# Altium PCB 00Key.PcbDoc (part 2 of 4)
Units mm, origin at the board's own origin, x right, y up, seen from the top; angles counter-clockwise.
Board outline 304.8 x 170.81 mm, 2 copper layers (F.Cu, B.Cu); 268 components, 236 nets, 1532 pads, 61 vias.
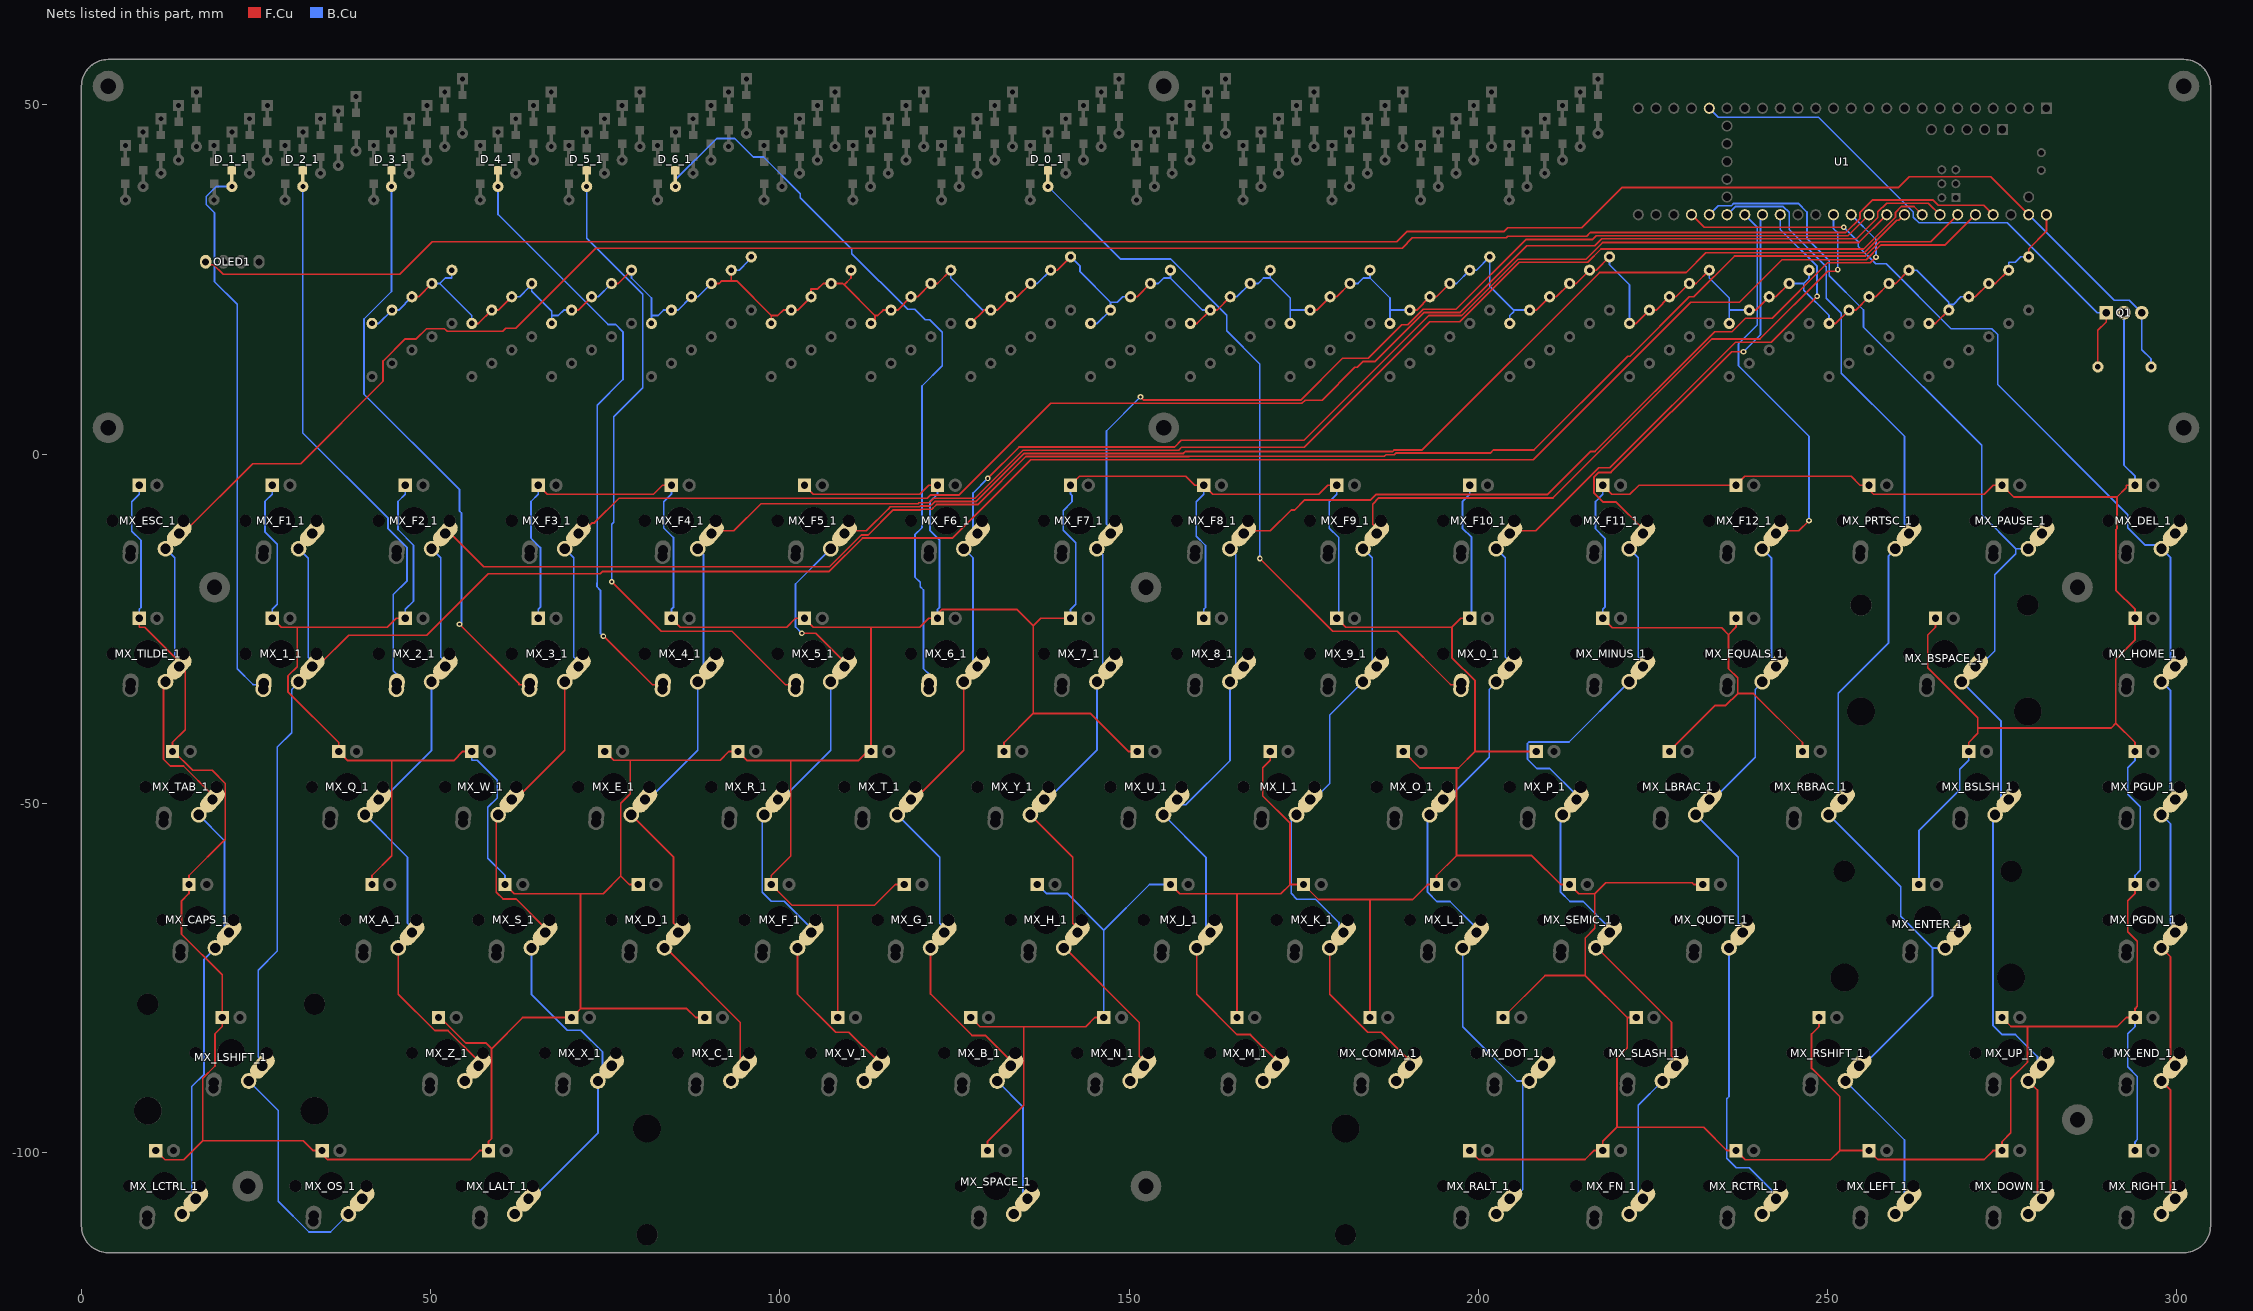
[diagram p2: the nets of this part, all layers, seen from the top]

## Via types
v1: diameter 0.8, hole 0.4, F.Cu to B.Cu, tented both sides, 61 vias

## Nets (pads, with @x,y where several pads share a name; then routed paths per layer and width w, separated by ;. In a path a pad name is that pad's centre, name@x,y a point inside that pad or via, vN(x,y) a via of type N, cw(c..) or ccw(c..) an arc to the next point about the centre after c; other vN are vias at no path point) (continued)
5V: R_0_1.2 R_1_1.2 R_2_1.2 R_3_1.2 R_4_1.2 R_5_1.2 R_6_1.2 R_7_1.2 R_8_1.2 R_9_1.2 R_A_1.2 R_B_1.2 R_BSLSH_1.2 R_BSPACE_1.2 R_C_1.2 R_CAPS_1.2 R_COMMA_1.2 R_D_1.2 R_DEL_1.2 R_DOT_1.2 R_DOWN_1.2 R_E_1.2 R_END_1.2 R_ENTER_1.2 R_EQUALS_1.2 R_ESC_1.2 R_F1_1.2 R_F2_1.2 R_F3_1.2 R_F4_1.2 R_F5_1.2 R_F6_1.2 R_F7_1.2 R_F8_1.2 R_F9_1.2 R_F10_1.2 R_F11_1.2 R_F12_1.2 R_F_1.2 R_FN_1.2 R_G_1.2 R_H_1.2 R_HOME_1.2 R_I_1.2 R_J_1.2 R_K_1.2 R_L_1.2 R_LALT_1.2 R_LBRAC_1.2 R_LCTRL_1.2 R_LEFT_1.2 R_LSHIFT_1.2 R_M_1.2 R_MINUS_1.2 R_N_1.2 R_O_1.2 R_OS_1.2 R_P_1.2 R_PAUSE_1.2 R_PGDN_1.2 R_PGUP_1.2 R_PRTSC_1.2 R_Q_1.2 R_QUOTE_1.2 R_R_1.2 R_RALT_1.2 R_RBRAC_1.2 R_RCTRL_1.2 R_RIGHT_1.2 R_RSHIFT_1.2 R_S_1.2 R_SEMIC_1.2 R_SLASH_1.2 R_SPACE_1.2 R_T_1.2 R_TAB_1.2 R_TILDE_1.2 R_U_1.2 R_UP_1.2 R_V_1.2 R_W_1.2 R_X_1.2 R_Y_1.2 R_Z_1.2 U1.48 | length 384
  F.Cu w0.25: R_TAB_1.2@47.307,22.543 48.26,22.543 R_CAPS_1.2@50.165,24.447 ; R_F1_1.2@55.88,18.732 56.832,18.732 R_1_1.2@58.737,20.637 59.689,20.637 R_LSHIFT_1.2@61.594,22.543 ; R_2_1.2@70.168,20.637 71.119,20.637 R_Q_1.2@73.024,22.543 ; R_A_1.2@75.882,24.447 76.836,24.447 R_Z_1.2@78.741,26.352 ; R_S_1.2@90.171,24.447 91.296,24.447 91.66,24.811 93.027,24.811 ; R_X_1.2@93.027,26.352 93.027,25.79 93.027,24.811 ; R_F4_1.2@98.742,18.732 98.742,19.858 ; R_C_1.2@110.172,26.352 110.172,25.227 109.198,24.253 ; R_F5_1.2@113.031,18.732 113.593,18.732 113.593,19.858 ; R_V_1.2@124.461,26.352 122.556,24.447 R_F_1.2@121.602,24.447 119.697,22.543 R_R_1.2@118.744,22.543 116.839,20.637 R_5_1.2@115.887,20.637 114.762,20.637 113.983,19.858 113.593,19.858 ; R_F6_1.2@127.317,18.732 129.222,20.637 R_6_1.2@130.174,20.637 ; R_6_1.2@130.174,20.075 R_6_1.2@130.174,20.637 ; R_T_1.2@132.642,22.543 R_T_1.2@133.032,22.543 ; R_G_1.2@135.891,24.447 133.986,22.543 R_T_1.2@133.032,22.543 ; R_B_1.2@138.748,26.352 139.699,26.352 R_SPACE_1.2@141.604,28.258 ; R_Y_1.2@150.177,22.543 151.129,22.543 R_H_1.2@153.034,24.447 ; R_F8_1.2@158.751,18.732 159.702,18.732 R_8_1.2@161.607,20.637 162.559,20.637 R_U_1.2@164.464,22.543 ; R_9_1.2@175.894,20.637 176.847,20.637 R_I_1.2@178.752,22.543 179.706,22.543 R_K_1.2@181.611,24.447 ; R_0_1.2@190.183,20.637 191.136,20.637 R_O_1.2@193.041,22.543 193.992,22.543 R_L_1.2@195.897,24.447 ; R_MINUS_1.2@207.327,20.637 208.279,20.637 R_P_1.2@210.184,22.543 211.137,22.543 R_SEMIC_1.2@213.042,24.447 213.996,24.447 R_SLASH_1.2@215.901,26.352 216.852,26.352 R_FN_1.2@218.757,28.258 ; R_F12_1.2@221.614,18.732 222.567,18.732 R_EQUALS_1.2@224.472,20.637 225.426,20.637 R_LBRAC_1.2@227.331,22.543 228.282,22.543 R_QUOTE_1.2@230.188,24.447 231.139,24.447 R_RCTRL_1.2@233.044,26.352 ; R_RBRAC_1.2@238.761,20.637 239.712,20.637 R_ENTER_1.2@241.617,22.543 242.569,22.543 R_RSHIFT_1.2@244.474,24.447 ; R_PAUSE_1.2@250.191,18.732 251.142,18.732 R_BSPACE_1.2@253.047,20.637 253.999,20.637 R_BSLSH_1.2@255.904,22.543 256.858,22.543 R_UP_1.2@258.762,24.447 259.716,24.447 R_DOWN_1.2@261.621,26.352 ; R_DEL_1.2@264.477,18.732 265.429,18.732 R_HOME_1.2@267.334,20.637 ; R_PGUP_1.2@270.192,22.543 271.146,22.543 R_PGDN_1.2@273.051,24.447 274.002,24.447 R_END_1.2@275.907,26.352 ; R_RIGHT_1.2@278.764,28.258 278.764,29.383 281.304,31.923 U1.48@281.304,34.29 ; 93.027,24.811 93.789,24.811 98.742,19.858 ; 98.742,19.858 99.696,19.858 100.475,20.637 R_4_1.2@101.601,20.637 102.552,20.637 R_E_1.2@104.457,22.543 104.457,23.668 105.409,23.668 106.189,24.447 106.752,24.447 R_D_1.2@107.314,24.447 108.44,24.447 109.004,24.447 109.198,24.253 ; 109.198,24.253 113.593,19.858 ; R_6_1.2@130.174,20.637 131.127,20.637 R_T_1.2@133.032,22.543
  B.Cu w0.25: R_ESC_1.2@41.593,18.732 42.545,18.732 R_TILDE_1.2@44.45,20.637 45.402,20.637 R_TAB_1.2@47.307,22.543 ; R_CAPS_1.2@50.165,24.447 51.29,24.447 ; R_LCTRL_1.2@53.023,26.352 53.023,25.227 52.07,25.227 51.29,24.447 ; R_F1_1.2@55.88,18.732 55.88,19.858 51.29,24.447 ; R_LSHIFT_1.2@61.594,22.543 62.72,22.543 64.062,23.885 R_OS_1.2@64.453,23.885 ; R_OS_1.2@64.453,24.447 R_OS_1.2@64.453,23.885 ; R_F2_1.2@67.311,18.732 67.311,19.858 ; R_2_1.2@70.168,20.637 69.042,20.637 68.263,19.858 67.311,19.858 ; R_Q_1.2@73.024,22.543 73.977,22.543 R_A_1.2@75.882,24.447 ; R_Z_1.2@78.741,26.352 78.741,25.227 81.597,22.37 81.597,19.858 ; R_F3_1.2@81.597,18.732 81.597,19.858 ; R_S_1.2@90.171,24.447 88.266,22.543 R_W_1.2@87.312,22.543 85.407,20.637 R_3_1.2@84.454,20.637 83.892,20.637 83.329,20.637 82.549,19.858 81.597,19.858 ; R_X_1.2@93.027,26.352 94.153,26.352 95.495,27.695 95.884,27.695 R_LALT_1.2@95.884,28.258 ; R_V_1.2@124.461,26.352 124.461,25.227 129.049,20.639 ; 129.049,20.637 R_6_1.2@130.174,20.637 ; R_G_1.2@135.891,24.447 136.843,24.447 R_B_1.2@138.748,26.352 ; R_SPACE_1.2@141.604,28.258 142.962,26.9 142.962,26.122 147.321,21.763 ; R_F7_1.2@144.463,18.732 145.416,18.732 R_7_1.2@147.321,20.637 147.321,21.763 ; R_Y_1.2@150.177,22.543 149.052,22.543 148.273,21.763 147.321,21.763 ; R_H_1.2@153.034,24.447 154.16,24.447 154.939,25.227 155.892,25.227 ; R_N_1.2@155.892,26.352 155.892,25.227 ; R_8_1.2@161.607,20.637 160.482,20.637 155.892,25.227 ; R_U_1.2@164.464,22.543 165.417,22.543 R_J_1.2@167.322,24.447 168.448,24.447 169.227,25.227 170.181,25.227 ; R_M_1.2@170.181,26.352 170.181,25.227 ; R_F9_1.2@173.037,18.732 173.037,19.745 173.037,20.637 ; R_9_1.2@175.894,20.637 174.769,20.637 173.037,20.637 ; R_K_1.2@181.611,24.447 182.736,24.447 183.516,25.227 184.468,25.227 ; R_COMMA_1.2@184.468,26.352 184.468,25.227 ; R_F10_1.2@187.324,18.732 187.324,19.745 187.324,20.637 ; R_0_1.2@190.183,20.637 189.057,20.637 187.324,20.637 ; R_L_1.2@195.897,24.447 196.849,24.447 R_DOT_1.2@198.754,26.352 199.707,26.352 R_RALT_1.2@201.612,28.258 201.612,27.132 201.612,24.058 205.033,20.637 ; R_F11_1.2@204.471,18.732 204.471,19.858 205.033,20.421 205.033,20.637 ; R_MINUS_1.2@207.327,20.637 206.202,20.637 205.033,20.637 ; R_FN_1.2@218.757,28.258 218.757,27.132 221.614,24.275 R_F12_1.2@221.614,18.732 ; R_RCTRL_1.2@233.044,26.352 233.044,25.227 235.903,22.369 235.903,20.637 ; R_PRTSC_1.2@235.903,18.732 235.903,19.858 235.903,20.637 ; R_RBRAC_1.2@238.761,20.637 237.635,20.637 235.903,20.637 ; R_RSHIFT_1.2@244.474,24.447 245.6,24.447 246.553,24.447 ; R_LEFT_1.2@247.332,26.352 247.332,25.227 246.553,24.447 ; R_PAUSE_1.2@250.191,18.732 250.191,19.858 246.553,23.496 246.553,24.447 ; R_DOWN_1.2@261.621,26.352 262.746,26.352 ; 262.746,26.351 267.334,21.763 R_HOME_1.2@267.334,21.423 ; R_HOME_1.2@267.334,20.637 R_HOME_1.2@267.334,21.423 ; R_PGUP_1.2@270.192,22.543 269.067,22.543 267.948,21.423 R_HOME_1.2@267.334,21.423 ; R_END_1.2@275.907,26.352 275.907,27.478 276.859,27.478 277.639,28.258 R_RIGHT_1.2@278.764,28.258 ; R_OS_1.2@64.453,23.885 64.453,23.322 67.311,20.464 67.311,19.858 ; 170.181,25.227 173.037,22.37 173.037,20.637 ; 184.468,25.227 187.324,22.37 187.324,20.637
col0: MX_CAPS_1.1 MX_ESC_1.1 MX_LCTRL_1.1 MX_TAB_1.1 MX_TILDE_1.1 U1.45 | length 392.2
  F.Cu w0.25: MX_TILDE_1.1@12.025,-32.574 11.74,-32.86 11.74,-43.658 12.712,-44.63 14.597,-44.63 18.651,-48.684 18.711,-48.684 19.088,-49.061 18.098,-50.164 MX_TAB_1.1@16.788,-51.624 ; MX_ESC_1.1@12.025,-13.524 13.335,-12.214 13.335,-12.064 14.325,-10.961 14.895,-10.961 24.502,-1.354 31.38,-1.354 43.172,10.438 43.172,13.331 46.349,16.508 47.938,16.508 49.397,17.967 51.969,17.967 52.343,17.592 60.296,17.592 60.746,18.043 62.171,18.043 73.632,29.503 189.065,29.503 190.541,30.979 203.983,30.979 204.208,31.204 215.483,31.204 216.021,31.743 252.566,31.743 254.634,33.812 254.634,34.639 256.384,36.388 265.111,36.388 265.841,35.658 272.316,35.658 U1.45@273.684,34.29 ; MX_LCTRL_1.1@14.406,-108.774 14.406,-108.624 MX_LCTRL_1.1@15.716,-107.314
  B.Cu w0.25: MX_TILDE_1.1@12.025,-32.574 13.335,-31.264 13.335,-31.114 14.325,-30.011 13.335,-29.021 13.335,-14.834 MX_ESC_1.1@12.025,-13.524 ; MX_LCTRL_1.1@15.716,-107.314 15.778,-107.253 15.778,-90.518 17.552,-88.745 17.552,-72.292 MX_CAPS_1.1@19.169,-70.674 20.479,-69.364 20.479,-69.214 20.479,-67.121 20.479,-55.316 MX_TAB_1.1@16.788,-51.624
col1: MX_1_1.1 MX_F1_1.1 MX_LSHIFT_1.1 MX_OS_1.1 U1.44 | length 383.8
  F.Cu w0.25: MX_1_1.1@32.385,-31.114 33.375,-30.011 34.144,-30.011 38.237,-25.918 49.421,-25.918 58.227,-17.112 74.291,-17.112 74.626,-16.777 107.048,-16.777 111.817,-12.007 124.687,-12.007 135.916,-0.778 207.824,-0.778 230.365,21.763 237.364,21.763 243.449,27.848 255.503,27.848 257.627,29.971 266.826,29.971 U1.44@271.144,34.29 ; MX_OS_1.1@38.219,-108.774 38.219,-108.624 MX_OS_1.1@39.529,-107.314
  B.Cu w0.25: MX_1_1.1@31.075,-32.574 31.235,-32.415 MX_1_1.1@31.235,-32.396 ; MX_F1_1.1@32.385,-12.064 31.075,-13.374 MX_F1_1.1@31.075,-13.524 32.447,-14.896 32.447,-29.082 33.375,-30.011 32.385,-31.114 MX_1_1.1@31.235,-32.396 ; MX_OS_1.1@38.219,-108.774 35.642,-111.351 32.573,-111.351 28.163,-106.941 28.163,-93.956 MX_LSHIFT_1.1@23.931,-89.724 25.241,-88.414 25.241,-88.264 26.232,-87.161 25.303,-86.232 25.303,-73.86 28.04,-71.123 28.04,-41.911 30.085,-39.866 30.085,-33.678 MX_1_1.1@31.235,-32.396
col2: MX_2_1.1 MX_A_1.1 MX_F2_1.1 MX_Q_1.1 MX_Z_1.1 U1.43 | length 335.8
  F.Cu w0.25: MX_A_1.1@46.672,-69.214 45.363,-70.524 MX_A_1.1@45.363,-70.674 45.363,-77.288 50.58,-82.505 52.456,-82.505 56.735,-86.784 56.811,-86.784 57.188,-87.161 MX_Z_1.1@56.197,-88.264 ; MX_2_1.1@50.125,-32.574 50.125,-32.424 MX_2_1.1@51.435,-31.114 ; MX_F2_1.1@51.435,-12.064 52.425,-10.961 57.569,-16.105 107.083,-16.105 111.631,-11.557 112.619,-11.557 116.202,-7.974 120.15,-7.974 120.251,-7.874 121.723,-7.874 121.898,-7.698 121.906,-7.698 122.399,-7.205 128.294,-7.205 135.171,-0.328 158.565,-0.328 158.61,-0.283 186.532,-0.283 186.758,-0.056 187.919,-0.056 188.143,0.168 201.7,0.168 202.15,0.618 207.946,0.618 221.373,14.045 221.692,14.045 230.19,22.544 230.827,22.544 236.662,28.378 255.397,28.378 257.44,30.422 264.736,30.422 U1.43@268.604,34.29
  B.Cu w0.25: MX_A_1.1@46.672,-69.214 47.663,-68.111 46.672,-67.121 46.672,-57.697 MX_Q_1.1@40.6,-51.624 41.91,-50.314 41.91,-50.164 42.364,-50.164 50.125,-42.403 MX_2_1.1@50.125,-32.574 ; MX_2_1.1@51.435,-31.114 52.425,-30.011 51.435,-29.021 51.435,-14.834 MX_F2_1.1@50.125,-13.524 51.435,-12.214 MX_F2_1.1@51.435,-12.064 ; MX_Z_1.1@54.888,-89.724 56.197,-88.414 MX_Z_1.1@56.197,-88.264
col3: MX_3_1.1 MX_F3_1.1 MX_LALT_1.1 MX_S_1.1 MX_W_1.1 MX_X_1.1 U1.42 | length 336.7
  F.Cu w0.25: MX_S_1.1@64.413,-70.674 65.722,-69.364 65.722,-69.214 66.713,-68.111 66.336,-67.734 66.276,-67.734 62.222,-63.68 60.362,-63.68 59.365,-62.682 59.365,-51.91 MX_W_1.1@59.65,-51.624 60.96,-50.314 60.96,-50.164 61.95,-49.061 62.504,-49.061 69.174,-42.39 MX_3_1.1@69.174,-32.574 ; MX_F3_1.1@70.484,-12.064 71.475,-10.961 72.018,-10.961 73.15,-9.829 73.429,-9.829 76.955,-6.302 121.073,-6.302 121.523,-5.852 125.609,-5.852 138.757,7.296 174.723,7.296 175.173,7.746 177.611,7.746 182.31,12.444 182.628,12.444 183.477,13.294 185.238,13.294 192.253,20.308 197.393,20.308 206.918,29.833 216.659,29.833 217.668,30.842 254.122,30.842 257.174,33.895 257.174,34.691 258.421,35.938 264.417,35.938 U1.42@266.064,34.29
  B.Cu w0.25: MX_LALT_1.1@62.031,-108.774 63.341,-107.464 63.341,-107.314 63.841,-107.314 73.938,-97.218 MX_X_1.1@73.938,-89.724 73.938,-88.919 MX_X_1.1@74.593,-88.264 ; MX_S_1.1@64.413,-70.674 64.413,-77.288 69.571,-82.446 71.479,-82.446 74.593,-85.559 MX_X_1.1@74.593,-88.264 ; MX_3_1.1@69.174,-32.574 70.484,-31.264 70.484,-31.114 71.475,-30.011 70.484,-29.021 70.484,-14.834 MX_F3_1.1@69.174,-13.524 70.484,-12.214 MX_F3_1.1@70.484,-12.064 ; MX_X_1.1@75.248,-88.264 MX_X_1.1@74.593,-88.264
col4: MX_4_1.1 MX_C_1.1 MX_D_1.1 MX_E_1.1 MX_F4_1.1 U1.41 | length 287.1
  F.Cu w0.25: MX_E_1.1@78.701,-51.624 84.772,-57.696 84.772,-67.121 85.763,-68.111 84.772,-69.214 83.623,-70.364 MX_D_1.1@83.623,-70.674 ; MX_D_1.1@83.463,-70.674 MX_D_1.1@83.623,-70.674 ; MX_F4_1.1@89.534,-12.064 90.525,-10.961 93.402,-10.961 97.289,-7.073 119.777,-7.073 119.89,-6.96 121.34,-6.96 121.503,-6.797 121.533,-6.797 122.028,-6.302 127.923,-6.302 134.798,0.573 157.072,0.573 157.483,0.984 175.065,0.984 193.039,18.957 197.314,18.957 205.835,27.478 215.63,27.478 217.535,29.383 255.129,29.383 259.714,33.968 259.714,34.646 260.533,35.465 262.35,35.465 U1.41@263.524,34.29 ; MX_C_1.1@92.988,-89.724 94.297,-88.414 94.297,-88.264 94.297,-86.171 94.297,-81.349 MX_D_1.1@83.623,-70.674
  B.Cu w0.25: MX_E_1.1@78.701,-51.624 80.011,-50.314 80.011,-50.164 80.442,-50.164 88.224,-42.382 MX_4_1.1@88.224,-32.574 88.224,-31.946 MX_4_1.1@89.056,-31.114 ; MX_4_1.1@89.534,-31.114 MX_4_1.1@89.056,-31.114 ; MX_F4_1.1@89.534,-12.064 89.534,-12.214 MX_F4_1.1@88.224,-13.524 89.056,-14.356 MX_4_1.1@89.056,-31.114
col5: MX_5_1.1 MX_F5_1.1 MX_F_1.1 MX_R_1.1 MX_V_1.1 U1.40 | length 273.5
  F.Cu w0.25: v1(103.134,-25.629) 105.134,-25.629 109.138,-29.634 109.198,-29.634 109.575,-30.011 MX_5_1.1@108.584,-31.114 ; MX_F_1.1@103.822,-69.214 102.513,-70.524 MX_F_1.1@102.513,-70.674 102.513,-77.295 107.957,-82.739 109.856,-82.739 113.901,-86.784 113.961,-86.784 114.338,-87.161 113.347,-88.264 113.347,-88.414 MX_V_1.1@112.038,-89.724 ; MX_F5_1.1@108.584,-12.064 109.575,-10.961 112.372,-10.961 115.472,-7.861 115.81,-7.524 119.964,-7.524 120.077,-7.411 121.527,-7.411 121.69,-7.248 121.72,-7.248 122.214,-6.753 128.109,-6.753 134.985,0.123 157.756,0.123 158.027,0.394 187.733,0.394 187.957,0.618 191.928,0.618 217.333,26.023 229.753,26.023 232.558,28.829 255.211,28.829 259.873,33.49 260.185,33.49 U1.40@260.984,34.29
  B.Cu w0.25: v1(103.134,-25.629) 102.227,-24.722 102.227,-18.572 MX_F5_1.1@107.274,-13.524 108.584,-12.214 MX_F5_1.1@108.584,-12.064 ; MX_F_1.1@103.822,-69.214 104.813,-68.111 104.436,-67.734 104.352,-67.734 100.602,-63.983 98.739,-63.983 97.465,-62.709 97.465,-51.91 MX_R_1.1@97.751,-51.624 99.061,-50.314 99.061,-50.164 100.051,-49.061 100.596,-49.061 107.274,-42.383 MX_5_1.1@107.274,-32.574 107.274,-32.424 MX_5_1.1@108.584,-31.114
col6: MX_6_1.1 MX_B_1.1 MX_F6_1.1 MX_G_1.1 MX_SPACE_1.1 MX_T_1.1 U1.39 | length 269.3
  F.Cu w0.25: MX_T_1.1@118.111,-50.164 119.101,-49.061 119.645,-49.061 126.324,-42.382 MX_6_1.1@126.324,-32.574 126.324,-32.424 MX_6_1.1@127.634,-31.114 ; MX_G_1.1@122.872,-69.214 121.563,-70.524 MX_G_1.1@121.563,-70.674 121.563,-77.272 127.493,-83.202 129.369,-83.202 132.951,-86.784 133.011,-86.784 133.388,-87.161 MX_B_1.1@132.398,-88.264 ; v1(129.739,-3.46) 134.223,1.023 156.475,1.023 157.466,2.014 175.027,2.014 192.871,19.858 197.579,19.858 205.649,27.928 215.391,27.928 217.768,30.306 254.46,30.306 U1.39@258.444,34.29 ; MX_SPACE_1.1@133.469,-108.774 133.469,-108.624 MX_SPACE_1.1@134.779,-107.314
  B.Cu w0.25: MX_T_1.1@118.111,-50.164 118.111,-50.314 MX_T_1.1@116.801,-51.624 122.872,-57.696 122.872,-67.121 123.863,-68.111 MX_G_1.1@122.872,-69.214 ; MX_6_1.1@127.634,-31.114 127.634,-29.021 127.634,-14.834 MX_F6_1.1@126.324,-13.524 127.634,-12.214 127.634,-12.064 127.644,-12.055 127.644,-5.556 v1(129.739,-3.46) ; MX_B_1.1@132.398,-88.264 131.088,-89.574 MX_B_1.1@131.088,-89.724 134.779,-93.416 134.779,-104.934 MX_SPACE_1.1@134.779,-107.314
col7: MX_7_1.1 MX_F7_1.1 MX_H_1.1 MX_N_1.1 MX_Y_1.1 U1.38 | length 231.8
  F.Cu w0.25: MX_Y_1.1@137.161,-50.164 135.851,-51.474 MX_Y_1.1@135.851,-51.624 141.922,-57.696 141.922,-67.121 142.913,-68.111 141.922,-69.214 140.773,-70.364 MX_H_1.1@140.773,-70.674 ; MX_H_1.1@140.613,-70.674 MX_H_1.1@140.773,-70.674 ; MX_N_1.1@150.138,-89.724 151.447,-88.414 151.447,-88.264 152.438,-87.161 151.447,-86.171 151.447,-81.349 MX_H_1.1@140.773,-70.674 ; v1(151.618,8.204) 152.073,7.75 174.539,7.75 180.534,13.744 184.193,13.744 189.003,18.554 189.861,18.554 192.066,20.759 196.781,20.759 206.756,30.734 216.286,30.734 216.844,31.293 252.907,31.293 U1.38@255.904,34.29
  B.Cu w0.25: MX_Y_1.1@137.161,-50.164 138.151,-49.061 138.694,-49.061 145.374,-42.38 MX_7_1.1@145.374,-32.574 145.374,-31.946 MX_7_1.1@146.206,-31.114 ; MX_7_1.1@146.684,-31.114 MX_7_1.1@146.206,-31.114 ; v1(151.618,8.204) 146.746,3.332 146.746,-10.032 147.675,-10.961 146.684,-12.064 146.684,-12.214 MX_F7_1.1@145.374,-13.524 146.206,-14.356 MX_7_1.1@146.206,-31.114
col8: MX_8_1.1 MX_F8_1.1 MX_J_1.1 MX_M_1.1 MX_U_1.1 U1.37 | length 209.9
  F.Cu w0.25: MX_J_1.1@159.663,-70.674 159.663,-77.31 165.435,-83.083 167.35,-83.083 171.051,-86.784 171.111,-86.784 171.488,-87.161 MX_M_1.1@170.498,-88.264 ; MX_F8_1.1@165.734,-12.064 166.725,-10.961 170.198,-10.961 173.182,-7.977 173.705,-7.977 175.148,-6.533 184.569,-6.533 185.357,-5.746 209.899,-5.746 216.051,0.406 216.688,0.406 233.817,17.536 236.298,17.536 238.23,19.469 242.04,19.469 249.969,27.397 256.078,27.397 v1(256.908,28.227)
  B.Cu w0.25: MX_J_1.1@159.663,-70.674 160.972,-69.364 160.972,-69.214 160.972,-67.121 160.972,-57.696 MX_U_1.1@154.901,-51.624 156.211,-50.314 156.211,-50.164 158.114,-50.164 164.424,-43.854 164.424,-41.869 MX_8_1.1@164.424,-32.574 164.424,-31.946 MX_8_1.1@165.256,-31.114 ; MX_8_1.1@165.734,-31.114 MX_8_1.1@165.256,-31.114 ; MX_F8_1.1@165.734,-12.064 165.734,-12.214 MX_F8_1.1@164.424,-13.524 165.256,-14.356 MX_8_1.1@165.256,-31.114 ; MX_M_1.1@169.188,-89.724 169.188,-89.574 MX_M_1.1@170.498,-88.264 ; U1.37@253.364,34.29 256.908,30.746 v1(256.908,28.227)
col9: MX_9_1.1 MX_COMMA_1.1 MX_F9_1.1 MX_I_1.1 MX_K_1.1 U1.36 | length 190
  F.Cu w0.25: MX_K_1.1@178.713,-70.674 178.713,-77.316 184.146,-82.749 186.066,-82.749 190.101,-86.784 190.161,-86.784 190.538,-87.161 189.547,-88.264 189.547,-88.414 MX_COMMA_1.1@188.238,-89.724 ; MX_F9_1.1@184.784,-12.064 185.775,-10.961 184.845,-10.031 184.845,-7.155 185.747,-6.253 210.665,-6.253 233.416,16.498 240.288,16.498 250.001,26.211 251.215,26.211 v1(251.433,26.43)
  B.Cu w0.25: MX_K_1.1@178.713,-70.674 180.022,-69.364 180.022,-69.214 180.022,-67.053 176.662,-63.692 174.002,-63.692 173.179,-62.869 173.179,-52.396 MX_I_1.1@173.951,-51.624 175.261,-50.314 175.261,-50.164 175.689,-50.164 178.722,-47.132 178.722,-37.327 MX_9_1.1@183.474,-32.574 184.784,-31.264 184.784,-31.114 184.784,-29.021 184.784,-14.834 MX_F9_1.1@183.474,-13.524 184.784,-12.214 MX_F9_1.1@184.784,-12.064 ; U1.36@250.824,34.29 250.824,32.302 251.433,31.693 v1(251.433,26.43)
col10: MX_0_1.1 MX_DOT_1.1 MX_F10_1.1 MX_L_1.1 MX_O_1.1 MX_RALT_1.1 U1.33 | length 191.8
  F.Cu w0.25: MX_F10_1.1@203.834,-12.064 204.825,-10.961 208.171,-10.961 217.206,-1.926 218.815,-1.926 236.788,16.048 241.894,16.048 v1(248.476,22.629) ; MX_DOT_1.1@207.288,-89.724 208.597,-88.414 MX_DOT_1.1@208.597,-88.264
  B.Cu w0.25: MX_RALT_1.1@202.524,-108.774 203.834,-107.464 203.834,-107.314 204.825,-106.211 205.397,-106.211 206.342,-105.266 MX_DOT_1.1@206.342,-89.724 ; MX_0_1.1@202.524,-32.574 202.524,-32.688 201.534,-33.678 ; MX_F10_1.1@203.834,-12.064 202.524,-13.374 MX_F10_1.1@202.524,-13.524 203.834,-14.834 203.834,-29.021 204.825,-30.011 203.834,-31.114 201.534,-33.678 ; MX_DOT_1.1@207.288,-89.724 MX_DOT_1.1@206.342,-89.724 ; U1.33@243.204,34.29 243.204,32.168 248.476,26.897 v1(248.476,22.629) ; 201.534,-33.678 201.534,-43.403 195.877,-49.061 195.301,-49.061 194.311,-50.164 194.311,-50.314 MX_O_1.1@193.001,-51.624 192.715,-51.91 192.715,-62.72 194.027,-64.033 195.925,-64.033 199.626,-67.734 199.686,-67.734 200.063,-68.111 199.072,-69.214 197.763,-70.524 MX_L_1.1@197.763,-70.674 197.763,-81.98 205.508,-89.724 MX_DOT_1.1@206.342,-89.724
col11: MX_F11_1.1 MX_FN_1.1 MX_MINUS_1.1 MX_P_1.1 MX_SEMIC_1.1 MX_SLASH_1.1 U1.32 | length 189.6
  F.Cu w0.25: MX_SEMIC_1.1@216.813,-70.674 MX_SEMIC_1.1@216.973,-70.674 ; MX_SEMIC_1.1@218.123,-69.214 216.973,-70.364 MX_SEMIC_1.1@216.973,-70.674 ; MX_F11_1.1@222.884,-12.064 223.875,-10.961 223.498,-10.584 223.475,-10.584 219.74,-6.848 217.843,-6.848 216.527,-5.532 216.527,-3.315 217.24,-2.601 218.959,-2.601 236.235,14.675 v1(237.946,14.675) ; MX_SLASH_1.1@227.647,-88.264 228.638,-87.161 227.647,-86.171 227.647,-81.349 MX_SEMIC_1.1@216.973,-70.674
  B.Cu w0.25: MX_SEMIC_1.1@218.123,-69.214 219.113,-68.111 218.736,-67.734 218.676,-67.734 214.975,-64.033 213.107,-64.033 211.756,-62.682 211.756,-51.919 MX_P_1.1@212.051,-51.624 213.361,-50.314 213.361,-50.164 214.351,-49.061 213.974,-48.684 213.914,-48.684 210.213,-44.983 208.354,-44.983 207.003,-43.632 207.003,-41.422 207.228,-41.197 212.952,-41.197 MX_MINUS_1.1@221.574,-32.574 222.884,-31.264 222.884,-31.114 223.875,-30.011 222.884,-29.021 222.884,-14.834 MX_F11_1.1@221.574,-13.524 221.574,-13.374 MX_F11_1.1@222.884,-12.064 ; MX_FN_1.1@221.574,-108.774 221.574,-108.624 222.884,-107.314 222.884,-93.177 MX_SLASH_1.1@226.338,-89.724 227.647,-88.414 MX_SLASH_1.1@227.647,-88.264 ; v1(237.946,14.675) 240.366,17.095 240.366,33.992 U1.32@240.664,34.29
col12: MX_EQUALS_1.1 MX_F12_1.1 MX_LBRAC_1.1 MX_QUOTE_1.1 MX_RCTRL_1.1 U1.31 | length 169.5
  F.Cu w0.25: MX_F12_1.1@241.934,-12.064 242.925,-10.961 245.859,-10.961 v1(247.316,-9.504)
  B.Cu w0.25: U1.31@238.124,34.29 239.916,32.498 239.916,18.498 237.221,15.803 237.221,12.689 247.316,2.593 v1(247.316,-9.504) ; MX_RCTRL_1.1@240.624,-108.774 240.624,-108.624 241.934,-107.314 242,-107.249 242,-105.345 238.787,-102.133 236.883,-102.133 235.554,-100.803 235.554,-92.262 235.863,-91.953 MX_QUOTE_1.1@235.863,-70.674 235.863,-70.524 237.172,-69.214 238.163,-68.111 237.172,-67.121 237.172,-57.696 MX_LBRAC_1.1@231.101,-51.624 232.411,-50.314 232.411,-50.164 233.401,-49.061 233.968,-49.061 239.634,-43.394 239.634,-33.678 ; MX_EQUALS_1.1@240.624,-32.574 240.624,-32.688 239.634,-33.678 ; MX_F12_1.1@241.934,-12.064 241.934,-12.214 MX_F12_1.1@240.624,-13.524 241.934,-14.834 241.934,-29.021 242.925,-30.011 241.934,-31.114 239.634,-33.678
col13: MX_ENTER_1.1 MX_LEFT_1.1 MX_PRTSC_1.1 MX_RBRAC_1.1 MX_RSHIFT_1.1 U1.30 | length 186.9
  F.Cu w0.25: MX_ENTER_1.1@266.819,-70.674 268.129,-69.364 MX_ENTER_1.1@268.129,-69.214
  B.Cu w0.25: U1.30@235.584,34.29 236.751,35.457 243.644,35.457 244.474,34.626 244.474,32.169 249.778,26.865 249.778,22.345 251.922,20.202 251.922,11.62 260.984,2.557 260.984,-9.971 261.975,-10.961 260.984,-12.064 258.684,-14.628 ; MX_LEFT_1.1@259.674,-108.774 260.984,-107.464 260.984,-107.314 260.984,-105.221 260.984,-98.177 MX_RSHIFT_1.1@252.531,-89.724 252.531,-89.574 253.841,-88.264 254.832,-87.161 255.392,-87.161 264.983,-77.57 264.983,-70.674 ; MX_PRTSC_1.1@259.674,-13.524 259.674,-13.638 258.684,-14.628 ; MX_ENTER_1.1@266.819,-70.674 264.983,-70.674 ; 258.684,-14.628 258.684,-27.059 251.522,-34.221 251.522,-48.132 252.451,-49.061 251.461,-50.164 250.151,-51.474 MX_RBRAC_1.1@250.151,-51.624 260.439,-61.913 260.439,-66.13 264.983,-70.674
col14: MX_BSLSH_1.1 MX_BSPACE_1.1 MX_DOWN_1.1 MX_PAUSE_1.1 MX_UP_1.1 U1.29 | length 186.9
  F.Cu w0.25: MX_DOWN_1.1@278.724,-108.774 280.034,-107.464 280.034,-107.314 280.034,-105.221 280.034,-91.034 MX_UP_1.1@278.724,-89.724
  B.Cu w0.25: U1.29@233.044,34.29 234.314,35.56 236.218,35.56 236.565,35.907 245.791,35.907 247.014,34.683 247.014,30.903 250.229,27.689 250.229,25.543 255.117,20.654 255.117,18.198 272.036,1.279 272.036,-8.63 276.93,-13.524 ; MX_BSLSH_1.1@275.272,-50.164 MX_BSLSH_1.1@274.794,-50.164 ; MX_UP_1.1@278.724,-89.724 280.034,-88.414 280.034,-88.264 280.034,-86.23 276.887,-83.083 274.964,-83.083 273.677,-81.796 273.677,-51.91 MX_BSLSH_1.1@273.963,-51.624 273.963,-50.996 MX_BSLSH_1.1@274.794,-50.164 ; MX_PAUSE_1.1@280.034,-12.064 278.724,-13.374 MX_PAUSE_1.1@278.724,-13.524 276.93,-13.524 ; MX_BSLSH_1.1@274.794,-50.164 274.794,-38.168 MX_BSPACE_1.1@269.201,-32.574 270.511,-31.264 270.511,-31.114 271.501,-30.011 272.048,-30.011 273.896,-28.163 273.896,-17.26 276.93,-14.226 276.93,-13.524
col15: MX_DEL_1.1 MX_END_1.1 MX_HOME_1.1 MX_PGDN_1.1 MX_PGUP_1.1 MX_RIGHT_1.1 U1.28 | length 197
  F.Cu w0.25: U1.28@230.504,34.29 232.298,32.496 v1(252.293,32.496) ; MX_PGDN_1.1@297.774,-70.674 299.084,-71.984 299.084,-85.726 299.084,-88.264 299.084,-88.414 MX_END_1.1@297.774,-89.724 299.084,-91.034 299.084,-105.221 MX_RIGHT_1.1@299.084,-107.314
  B.Cu w0.25: v1(252.293,32.496) 254.373,30.416 254.373,29.737 256.851,27.259 258.354,27.259 267.642,17.971 273.504,17.971 274.332,17.143 274.332,9.986 292.955,-8.638 292.955,-10.546 295.39,-12.981 MX_DEL_1.1@297.774,-12.981 ; MX_RIGHT_1.1@297.774,-108.774 297.774,-108.624 MX_RIGHT_1.1@299.084,-107.314 ; MX_PGDN_1.1@297.774,-70.674 299.084,-69.364 299.084,-69.214 300.075,-68.111 299.084,-67.121 299.084,-52.934 MX_PGUP_1.1@297.774,-51.624 299.084,-50.314 299.084,-50.164 300.075,-49.061 299.084,-48.071 299.084,-33.884 MX_HOME_1.1@297.774,-32.574 299.084,-31.264 299.084,-31.114 299.084,-29.021 299.084,-14.834 MX_DEL_1.1@297.774,-13.524 MX_DEL_1.1@297.774,-12.981 ; MX_DEL_1.1@299.084,-12.064 298.168,-12.981 MX_DEL_1.1@297.774,-12.981
GND: OLED1.1 Q1.3 R_Q1_GATE_1.2 U1.47 | length 300.1
  F.Cu w0.25: OLED1.1@17.779,27.554 18.202,27.133 18.905,27.133 20.269,25.769 45.549,25.769 50.214,30.434 188.296,30.434 189.742,31.88 203.609,31.88 204.173,32.443 214.81,32.443 220.571,38.204 260.143,38.204 261.668,39.728 273.326,39.728 U1.47@278.764,34.29
  B.Cu w0.25: U1.47@278.764,34.29 291.026,22.029 293.185,22.029 Q1.3@294.957,20.256 294.957,14.968 296.29,13.635 R_Q1_GATE_1.2@296.29,12.509
LEDGND: MX_0_1.4 MX_1_1.4 MX_2_1.4 MX_3_1.4 MX_4_1.4 MX_5_1.4 MX_6_1.4 MX_7_1.4 MX_8_1.4 MX_9_1.4 MX_A_1.4 MX_B_1.4 MX_BSLSH_1.4 MX_BSPACE_1.4 MX_C_1.4 MX_CAPS_1.4 MX_COMMA_1.4 MX_D_1.4 MX_DEL_1.4 MX_DOT_1.4 MX_DOWN_1.4 MX_E_1.4 MX_END_1.4 MX_ENTER_1.4 MX_EQUALS_1.4 MX_ESC_1.4 MX_F1_1.4 MX_F2_1.4 MX_F3_1.4 MX_F4_1.4 MX_F5_1.4 MX_F6_1.4 MX_F7_1.4 MX_F8_1.4 MX_F9_1.4 MX_F10_1.4 MX_F11_1.4 MX_F12_1.4 MX_F_1.4 MX_FN_1.4 MX_G_1.4 MX_H_1.4 MX_HOME_1.4 MX_I_1.4 MX_J_1.4 MX_K_1.4 MX_L_1.4 MX_LALT_1.4 MX_LBRAC_1.4 MX_LCTRL_1.4 MX_LEFT_1.4 MX_LSHIFT_1.4 MX_M_1.4 MX_MINUS_1.4 MX_N_1.4 MX_O_1.4 MX_OS_1.4 MX_P_1.4 MX_PAUSE_1.4 MX_PGDN_1.4 MX_PGUP_1.4 MX_PRTSC_1.4 MX_Q_1.4 MX_QUOTE_1.4 MX_R_1.4 MX_RALT_1.4 MX_RBRAC_1.4 MX_RCTRL_1.4 MX_RIGHT_1.4 MX_RSHIFT_1.4 MX_S_1.4 MX_SEMIC_1.4 MX_SLASH_1.4 MX_SPACE_1.4 MX_T_1.4 MX_TAB_1.4 MX_TILDE_1.4 MX_U_1.4 MX_UP_1.4 MX_V_1.4 MX_W_1.4 MX_X_1.4 MX_Y_1.4 MX_Z_1.4 Q1.2 | length 1690.6
  F.Cu w0.25: MX_TILDE_1.4@8.255,-23.494 8.255,-24.772 9.084,-24.772 14.851,-30.54 14.851,-39.433 13.018,-41.267 13.018,-41.906 MX_TAB_1.4@13.018,-42.335 ; MX_LCTRL_1.4@10.636,-99.694 11.953,-101.011 14.632,-101.011 17.373,-98.269 ; MX_TAB_1.4@13.018,-42.544 MX_TAB_1.4@13.018,-42.335 ; MX_1_1.4@27.305,-23.494 28.583,-24.772 30.898,-24.772 ; MX_OS_1.4@34.449,-99.694 MX_OS_1.4@33.919,-99.694 ; MX_A_1.4@41.593,-61.594 41.593,-60.317 44.411,-57.498 44.411,-43.861 ; MX_2_1.4@46.355,-23.494 45.077,-23.494 43.799,-24.772 30.898,-24.772 ; MX_Z_1.4@51.117,-80.644 51.381,-80.644 55.042,-84.305 57.93,-84.305 58.711,-85.086 ; MX_W_1.4@55.88,-42.544 54.602,-42.544 53.286,-43.861 44.411,-43.861 ; MX_S_1.4@60.642,-61.594 61.962,-62.914 71.445,-62.914 ; MX_F3_1.4@65.404,-4.444 66.682,-5.722 81.899,-5.722 83.177,-4.444 MX_F4_1.4@84.454,-4.444 ; MX_E_1.4@74.931,-42.544 76.208,-43.822 78.568,-43.822 ; MX_D_1.4@79.692,-61.594 78.415,-61.594 77.204,-60.383 ; MX_4_1.4@84.454,-23.494 85.732,-24.772 100.949,-24.772 102.227,-23.494 MX_5_1.4@103.504,-23.494 104.782,-24.772 113.031,-24.772 ; MX_C_1.4@89.218,-80.644 87.94,-80.644 86.662,-79.367 71.445,-79.367 ; MX_F5_1.4@103.504,-4.444 104.782,-5.722 119.999,-5.722 121.277,-4.444 MX_F6_1.4@122.554,-4.444 ; MX_V_1.4@108.267,-80.644 108.267,-64.581 ; MX_T_1.4@113.031,-42.544 MX_T_1.4@113.031,-42.018 ; MX_G_1.4@117.792,-61.594 116.515,-61.594 113.529,-64.581 108.267,-64.581 ; MX_6_1.4@122.554,-23.494 MX_6_1.4@121.916,-23.494 ; MX_B_1.4@127.317,-80.644 128.636,-81.963 134.892,-81.963 ; MX_SPACE_1.4@129.699,-99.694 129.699,-98.417 134.892,-93.224 134.892,-81.963 ; MX_Y_1.4@132.081,-42.544 132.081,-41.267 136.245,-37.102 ; MX_7_1.4@141.604,-23.494 140.327,-23.494 137.326,-23.494 136.245,-24.575 ; MX_F7_1.4@141.604,-4.444 142.882,-3.167 158.099,-3.167 159.377,-4.444 MX_F8_1.4@160.654,-4.444 161.932,-5.722 177.149,-5.722 178.427,-4.444 MX_F9_1.4@179.704,-4.444 ; MX_N_1.4@146.368,-80.644 145.09,-80.644 143.771,-81.963 134.892,-81.963 ; MX_U_1.4@151.131,-42.544 149.853,-42.544 144.41,-37.102 136.245,-37.102 ; MX_J_1.4@155.892,-61.594 157.209,-62.911 165.417,-62.911 ; MX_M_1.4@165.417,-80.644 165.417,-79.367 165.417,-62.911 ; MX_I_1.4@170.181,-42.544 170.181,-43.822 169.121,-44.881 169.121,-48.933 173.026,-52.837 173.026,-61.594 ; MX_9_1.4@179.704,-23.494 180.986,-24.776 196.196,-24.776 ; MX_COMMA_1.4@184.468,-80.644 184.468,-79.367 184.468,-63.746 ; MX_O_1.4@189.231,-42.544 191.601,-44.915 196.848,-44.915 ; MX_RALT_1.4@198.754,-99.694 200.032,-100.972 215.249,-100.972 216.527,-99.694 MX_FN_1.4@217.804,-99.694 217.804,-98.37 219.818,-96.357 ; MX_0_1.4@198.754,-23.494 197.477,-23.494 196.196,-24.776 ; MX_DOT_1.4@203.517,-80.644 209.526,-74.636 215.281,-74.636 ; MX_P_1.4@208.281,-42.544 207.003,-42.544 199.511,-42.544 ; MX_MINUS_1.4@217.804,-23.494 219.159,-24.849 234.82,-24.849 235.799,-25.828 ; MX_F11_1.4@217.804,-4.444 219.082,-5.722 221.677,-5.722 222.978,-4.421 235.554,-4.421 235.577,-4.444 MX_F12_1.4@236.854,-4.444 238.139,-3.16 253.342,-3.16 254.627,-4.444 MX_PRTSC_1.4@255.266,-4.444 ; MX_SLASH_1.4@222.567,-80.644 221.29,-80.644 ; MX_LBRAC_1.4@227.331,-42.544 233.92,-35.955 235.412,-35.955 237.104,-34.263 ; MX_QUOTE_1.4@232.093,-61.594 230.815,-61.594 230.578,-61.357 218.201,-61.357 216.647,-62.911 ; MX_EQUALS_1.4@236.854,-23.494 236.854,-24.772 235.799,-25.828 ; MX_RBRAC_1.4@246.381,-42.544 246.381,-41.267 239.377,-34.263 237.104,-34.263 ; MX_RSHIFT_1.4@248.761,-80.644 248.761,-81.922 247.689,-82.995 247.689,-87.928 251.706,-91.945 251.706,-99.694 ; MX_PRTSC_1.4@255.904,-4.444 MX_PRTSC_1.4@255.266,-4.444 ; MX_BSPACE_1.4@265.431,-23.494 265.431,-24.772 264.331,-25.872 264.331,-30.581 271.489,-37.739 271.489,-39.185 ; MX_BSLSH_1.4@270.192,-42.544 270.192,-41.267 271.489,-39.97 271.489,-39.185 ; MX_UP_1.4@274.954,-80.644 276.232,-81.922 278.592,-81.922 ; MX_PGDN_1.4@294.004,-61.594 294.004,-62.872 292.944,-63.933 292.944,-68.354 294.32,-69.73 294.32,-79.051 294.004,-79.367 MX_END_1.4@294.004,-80.644 292.727,-80.644 291.449,-81.922 278.592,-81.922 ; MX_PGUP_1.4@294.004,-42.544 294.004,-41.267 291.244,-38.506 ; MX_DEL_1.4@294.004,-4.444 292.727,-4.444 292.727,-4.806 291.409,-6.124 ; MX_TAB_1.4@13.018,-42.335 15.939,-45.257 18.7,-45.257 20.585,-47.142 20.585,-55.13 15.399,-60.317 MX_CAPS_1.4@15.399,-61.594 15.399,-62.872 14.301,-63.97 14.301,-68.683 20.161,-74.543 MX_LSHIFT_1.4@20.161,-80.644 20.161,-81.17 20.161,-81.922 19.112,-82.972 19.112,-87.588 17.373,-89.327 17.373,-98.269 ; 17.373,-98.269 31.746,-98.269 33.171,-99.694 33.81,-99.694 MX_OS_1.4@33.919,-99.694 ; 30.898,-24.772 30.898,-30.408 29.555,-31.75 29.555,-33.991 36.83,-41.267 MX_Q_1.4@36.83,-42.544 38.147,-43.861 44.411,-43.861 ; MX_OS_1.4@33.919,-99.694 35.197,-100.972 55.706,-100.972 56.984,-99.694 MX_LALT_1.4@58.261,-99.694 58.261,-98.417 58.711,-97.967 58.711,-85.086 ; 58.711,-85.086 63.153,-80.644 MX_X_1.4@70.168,-80.644 71.445,-79.367 ; 71.445,-79.367 71.445,-62.914 ; 71.445,-62.914 74.673,-62.914 77.204,-60.383 ; 77.204,-60.383 77.204,-49.951 78.568,-48.587 78.568,-43.822 ; 78.568,-43.822 91.425,-43.822 92.703,-42.544 MX_R_1.4@93.981,-42.544 95.297,-43.861 101.543,-43.861 ; 101.543,-43.861 101.543,-57.517 98.742,-60.317 98.742,-61.069 MX_F_1.4@98.742,-61.594 101.729,-64.581 108.267,-64.581 ; 101.543,-43.861 111.188,-43.861 MX_T_1.4@113.031,-42.018 ; MX_T_1.4@113.031,-42.018 113.031,-41.267 113.031,-24.772 ; 113.031,-24.772 119.999,-24.772 121.277,-23.494 MX_6_1.4@121.916,-23.494 ; MX_6_1.4@121.916,-23.494 123.193,-22.217 133.886,-22.217 136.245,-24.575 ; 136.245,-37.102 136.245,-24.575 ; 165.417,-62.911 171.709,-62.911 173.026,-61.594 ; 173.026,-61.594 173.665,-61.594 MX_K_1.4@174.942,-61.594 177.094,-63.746 184.468,-63.746 ; 184.468,-63.746 190.563,-63.746 192.715,-61.594 MX_L_1.4@193.992,-61.594 193.992,-60.317 196.848,-57.461 ; 196.196,-24.776 196.196,-29.121 199.511,-32.437 199.511,-42.544 ; 196.848,-57.461 207.631,-57.461 211.765,-61.594 MX_SEMIC_1.4@213.042,-61.594 214.359,-62.911 216.647,-62.911 ; 196.848,-57.461 196.848,-44.915 ; 196.848,-44.915 197.141,-44.915 199.511,-42.544 ; 215.281,-74.636 215.281,-69.253 216.647,-67.886 216.647,-62.911 ; 215.281,-74.636 221.29,-80.644 ; 219.818,-96.357 219.818,-86.464 221.29,-84.992 221.29,-80.644 ; 219.818,-96.357 232.239,-96.357 235.577,-99.694 MX_RCTRL_1.4@236.854,-99.694 238.171,-101.011 250.39,-101.011 251.706,-99.694 ; 235.799,-25.828 235.799,-30.685 237.104,-31.991 237.104,-34.263 ; 251.706,-99.694 254.627,-99.694 MX_LEFT_1.4@255.904,-99.694 257.182,-100.972 272.399,-100.972 273.677,-99.694 MX_DOWN_1.4@274.954,-99.694 274.954,-98.417 276.217,-97.155 276.217,-89.424 278.592,-87.049 278.592,-81.922 ; MX_PRTSC_1.4@255.266,-4.444 256.543,-5.722 272.399,-5.722 273.677,-4.444 MX_PAUSE_1.4@274.954,-4.444 276.634,-6.124 291.409,-6.124 ; 271.489,-39.185 290.566,-39.185 291.244,-38.506 ; 291.244,-38.506 291.244,-29.325 294.004,-26.565 MX_HOME_1.4@294.004,-23.494 294.004,-22.217 291.252,-19.464 291.252,-10.793 291.409,-10.635 291.409,-6.124
  B.Cu w0.25: MX_TILDE_1.4@8.255,-23.494 8.255,-22.217 8.528,-21.943 8.528,-12.329 7.202,-11.003 7.202,-6.775 8.255,-5.722 MX_ESC_1.4@8.255,-4.444 ; MX_1_1.4@27.305,-23.494 27.305,-22.217 28.021,-21.5 28.021,-12.878 26.256,-11.113 26.256,-6.772 27.305,-5.722 MX_F1_1.4@27.305,-4.444 ; MX_2_1.4@46.355,-23.494 46.355,-22.217 47.536,-21.036 47.536,-13.011 45.306,-10.781 45.306,-6.772 46.355,-5.722 MX_F2_1.4@46.355,-4.444 ; MX_W_1.4@55.88,-42.544 55.88,-43.822 56.679,-43.822 59.51,-46.653 59.51,-49.22 58.166,-50.563 58.166,-57.84 60.642,-60.317 MX_S_1.4@60.642,-61.594 ; MX_3_1.4@65.404,-23.494 65.404,-22.217 65.7,-21.921 65.7,-13.36 64.355,-12.016 64.355,-6.772 65.404,-5.722 MX_F3_1.4@65.404,-4.444 ; MX_4_1.4@84.454,-23.494 84.454,-22.217 84.742,-21.929 84.742,-11.924 83.373,-10.555 83.373,-6.804 84.454,-5.722 MX_F4_1.4@84.454,-4.444 ; MX_6_1.4@122.554,-23.494 122.554,-22.217 122.819,-21.952 122.819,-12.258 121.467,-10.906 121.467,-6.81 122.554,-5.722 MX_F6_1.4@122.554,-4.444 ; MX_H_1.4@136.843,-61.594 138.12,-62.872 141.116,-62.872 146.368,-68.123 ; MX_7_1.4@141.604,-23.494 141.604,-22.217 142.341,-21.481 142.341,-12.667 140.553,-10.879 140.553,-8.063 141.804,-6.812 141.804,-5.921 141.604,-5.722 MX_F7_1.4@141.604,-4.444 ; MX_N_1.4@146.368,-80.644 146.368,-79.367 146.368,-68.123 ; MX_J_1.4@155.892,-61.594 152.896,-61.594 146.368,-68.123 ; MX_8_1.4@160.654,-23.494 160.654,-22.217 160.925,-21.946 160.925,-13.07 159.581,-11.727 159.581,-6.796 160.654,-5.722 MX_F8_1.4@160.654,-4.444 ; MX_9_1.4@179.704,-23.494 179.992,-23.207 179.992,-11.924 178.64,-10.573 178.64,-6.786 179.704,-5.722 MX_F9_1.4@179.704,-4.444 ; MX_0_1.4@198.754,-23.494 199.01,-23.239 199.01,-11.893 197.7,-10.582 197.7,-6.777 198.754,-5.722 MX_F10_1.4@198.754,-4.444 ; MX_MINUS_1.4@217.804,-23.494 217.804,-22.217 218.101,-21.92 218.101,-12.009 216.744,-10.652 216.744,-6.783 217.804,-5.722 MX_F11_1.4@217.804,-4.444 ; MX_ENTER_1.4@263.049,-61.594 263.049,-53.908 268.915,-48.042 268.915,-45.1 270.192,-43.822 MX_BSLSH_1.4@270.192,-42.544 ; Q1.2@292.417,20.256 292.417,-1.58 294.004,-3.167 MX_DEL_1.4@294.004,-4.444 ; MX_RIGHT_1.4@294.004,-99.694 294.004,-98.417 294.32,-98.101 294.32,-89.078 292.955,-87.714 292.955,-82.972 294.004,-81.922 MX_END_1.4@294.004,-80.644 ; MX_PGDN_1.4@294.004,-61.594 294.004,-60.317 294.742,-59.579 294.742,-50.474 292.955,-48.687 292.955,-44.872 294.004,-43.822 MX_PGUP_1.4@294.004,-42.544
LEDPWM: Q1.1 R_Q1_GATE_1.1 U1.20 | length 77.6
  F.Cu w0.25: R_Q1_GATE_1.1@288.67,12.509 288.67,17.724 289.877,18.931 Q1.1@289.877,20.256
  B.Cu w0.25: U1.20@233.044,49.53 234.314,48.26 248.674,48.26 262.254,34.679 262.254,33.943 263.061,33.137 275.719,33.137 288.6,20.256 Q1.1@289.877,20.256
Net-(D_0_1-Pad2): D_0_1.2 MX_0_1.2 | length 109.2
  F.Cu w0.25: D_0_1.2@138.367,38.328 D_0_1.2@138.367,39.528 D_0_1.2@138.367,40.652 ; v1(168.702,-14.921) 179.13,-25.348 188.375,-25.348 195.996,-32.969 MX_0_1.2@197.524,-33.075
  B.Cu w0.25: D_0_1.2@138.367,38.328 148.733,27.961 155.909,27.961 163.948,19.922 163.948,17.667 168.702,12.913 v1(168.702,-14.921) ; MX_0_1.2@197.484,-33.654 197.484,-33.115 MX_0_1.2@197.524,-33.075
Net-(D_1_1-Pad2): D_1_1.2 MX_1_1.2 | length 81.4
  F.Cu w0.25: D_1_1.2@21.526,38.328 D_1_1.2@21.526,39.528 D_1_1.2@21.526,40.652 ; MX_1_1.2@26.035,-33.654 26.035,-33.115 MX_1_1.2@26.075,-33.075
  B.Cu w0.25: D_1_1.2@21.526,38.328 19.282,38.328 17.86,36.905 17.86,35.749 19.049,34.559 19.049,24.707 22.294,21.462 22.294,-30.717 24.547,-32.969 MX_1_1.2@26.075,-33.075
Net-(D_2_1-Pad2): D_2_1.2 MX_2_1.2 | length 81.6
  F.Cu w0.25: D_2_1.2@31.686,38.328 D_2_1.2@31.686,39.528 D_2_1.2@31.686,40.652
  B.Cu w0.25: D_2_1.2@31.686,38.328 31.686,3.039 43.895,-9.169 43.895,-10.644 46.611,-13.361 46.611,-18.096 44.623,-20.084 44.623,-30.982 45.228,-31.586 45.125,-33.075 45.125,-33.614 MX_2_1.2@45.085,-33.654
Net-(D_3_1-Pad2): D_3_1.2 MX_3_1.2 | length 86.8
  F.Cu w0.25: D_3_1.2@44.386,38.328 D_3_1.2@44.386,39.528 D_3_1.2@44.386,40.652 ; v1(54.123,-24.349) 62.646,-32.873 62.646,-32.969 64.174,-33.075 64.174,-33.614 MX_3_1.2@64.134,-33.654
  B.Cu w0.25: D_3_1.2@44.386,38.328 44.386,23.293 40.451,19.358 40.451,8.611 54.131,-5.069 54.131,-8.153 54.397,-8.419 54.397,-24.075 v1(54.123,-24.349)
Net-(D_4_1-Pad2): D_4_1.2 MX_4_1.2 | length 88.6
  F.Cu w0.25: D_4_1.2@59.627,38.328 D_4_1.2@59.627,39.528 D_4_1.2@59.627,40.652 ; v1(74.72,-26.046) 74.773,-26.046 81.696,-32.969 MX_4_1.2@83.224,-33.075
  B.Cu w0.25: D_4_1.2@59.627,38.328 59.627,34.338 75.391,18.574 76.495,18.574 77.515,17.554 77.515,10.704 73.841,7.03 73.841,-18.346 73.802,-18.385 73.802,-18.986 74.291,-19.475 74.292,-25.618 v1(74.72,-26.046) ; MX_4_1.2@83.184,-33.654 83.184,-33.115 MX_4_1.2@83.224,-33.075
Net-(D_5_1-Pad2): D_5_1.2 MX_5_1.2 | length 97.1
  F.Cu w0.25: D_5_1.2@72.326,38.328 D_5_1.2@72.326,39.528 D_5_1.2@72.326,40.652 ; v1(75.922,-18.248) 83.022,-25.348 93.125,-25.348 100.746,-32.969 MX_5_1.2@102.274,-33.075
  B.Cu w0.25: D_5_1.2@72.326,38.328 72.326,30.927 80.342,22.912 80.342,9.492 76.217,5.367 76.217,-9.742 75.922,-10.037 v1(75.922,-18.248) ; MX_5_1.2@102.234,-33.654 102.234,-33.115 MX_5_1.2@102.274,-33.075
Net-(D_6_1-Pad2): D_6_1.2 MX_6_1.2 | length 109.8
  F.Cu w0.25: D_6_1.2@85.026,38.328 D_6_1.2@85.026,39.528 D_6_1.2@85.026,40.652
  B.Cu w0.25: D_6_1.2@85.026,38.328 85.026,39.297 90.935,45.205 93.536,45.205 96.182,42.56 97.634,42.56 102.907,37.286 102.907,36.742 110.287,29.362 110.287,28.726 118.265,20.748 119.306,20.748 120.806,19.249 121.443,19.249 123.23,17.461 123.23,12.677 120.329,9.776 120.329,-10.519 119.316,-11.533 119.316,-17.569 120.095,-18.348 120.095,-18.985 120.545,-19.435 120.545,-30.704 121.427,-31.586 121.324,-33.075 121.324,-33.614 MX_6_1.2@121.284,-33.654